# Altium PCB MAGI's7SegmentDisplay-Invert.PcbDoc
Units mil, origin at the board's own origin, x right, y up, seen from the top; angles counter-clockwise.
Board outline 6000 x 4000 mil, 2 copper layers (Top Layer, Bottom Layer); 16 components, 27 nets, 94 pads, 28 vias.
Unrouted connection lines stored in the file: 1.
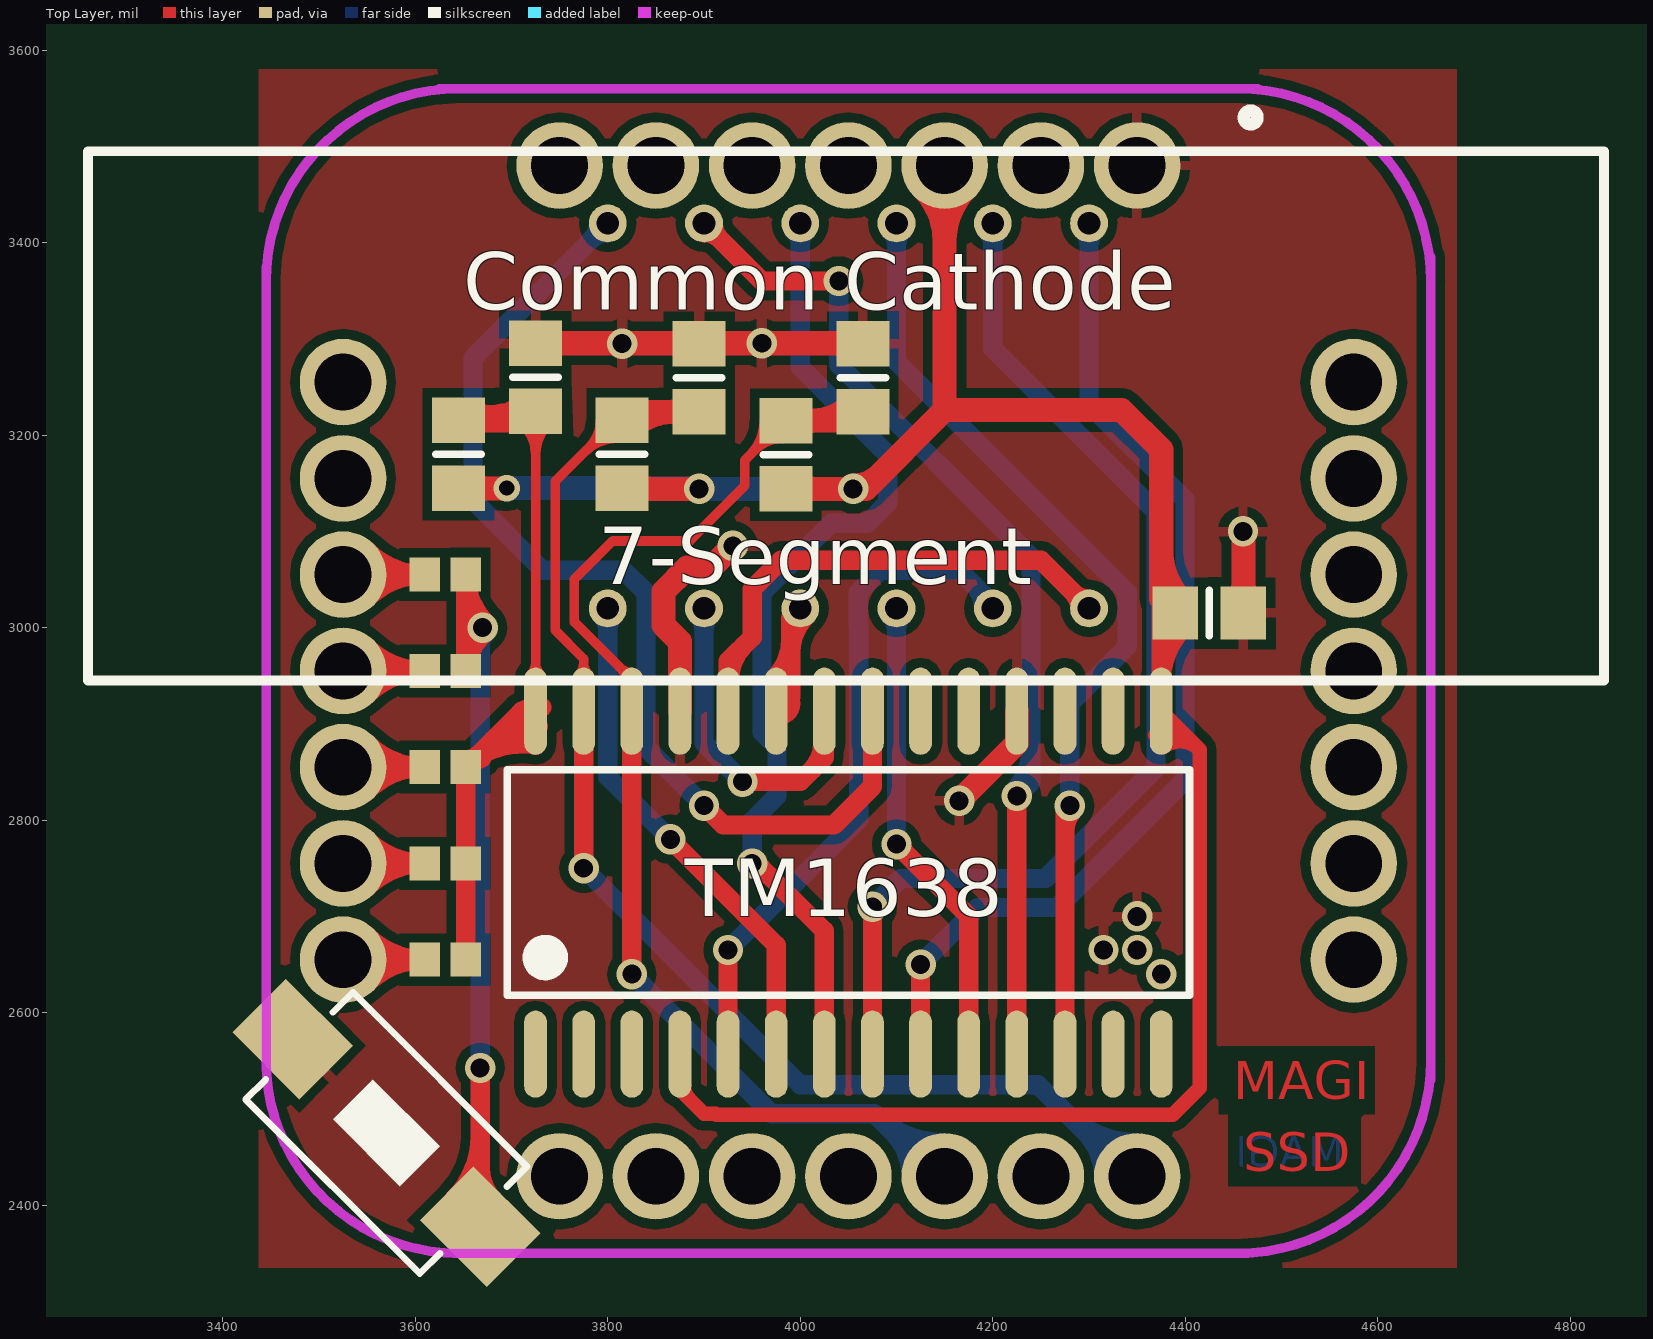
[diagram p0: Top Layer view]
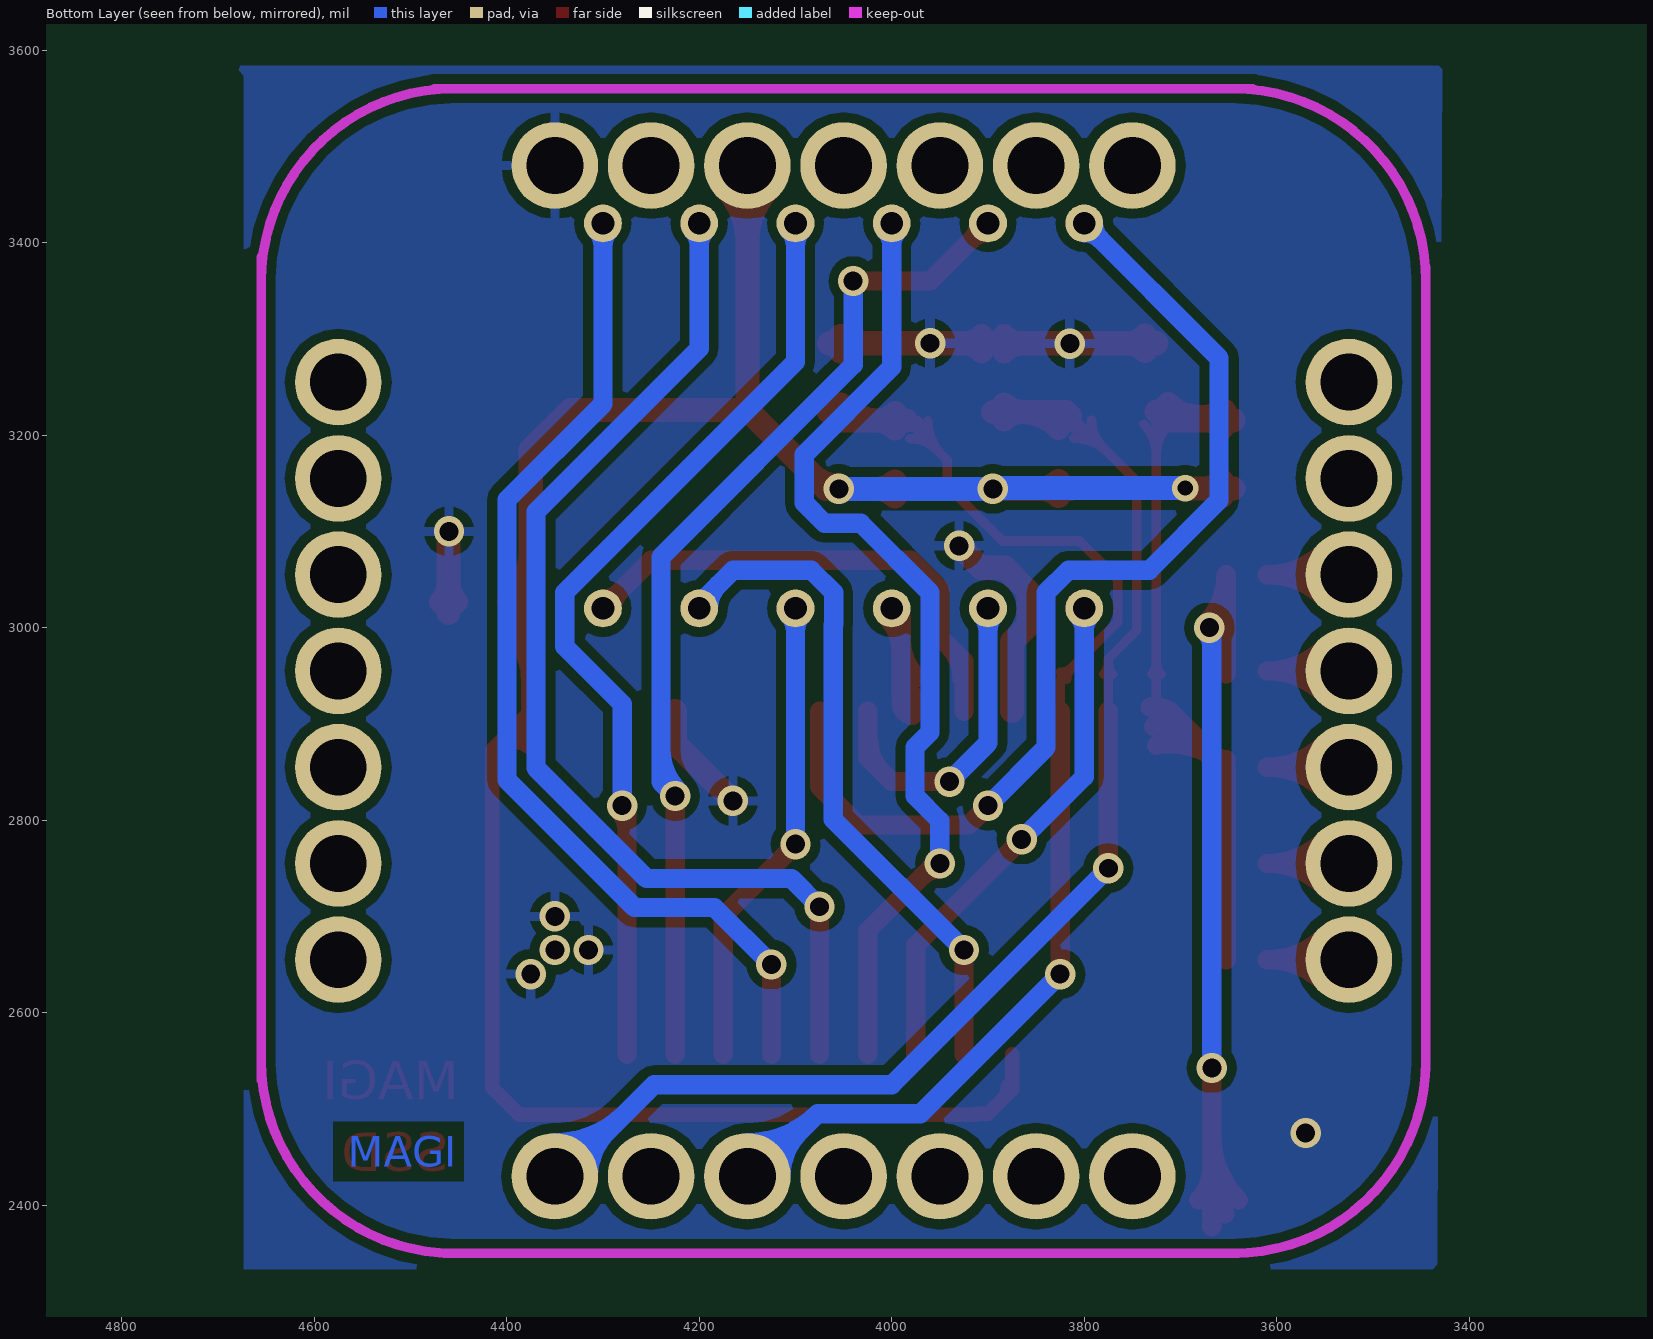
[diagram p1: Bottom Layer view, seen from below]

## Layer stack, top to bottom
Top Solder: solder mask 0.4, Solder Resist, Dk 3.5
Top Layer: signal copper 1.4
Dielectric1: dielectric 12.6, FR-4, Dk 4.8
Bottom Layer: signal copper 1.4
Bottom Solder: solder mask 0.4, Solder Resist, Dk 3.5

## Board outline
1000,1000 7000,1000 7000,5000 1000,5000

## Design rules (kind name [scope] priority, off if disabled: settings)
Clearance [All] p1: gap=10
PolygonConnect [All] p1: connectstyle=Relief reliefconductorwidth=10 reliefentries=4 polygonreliefangle="90 Angle" airgapwidth=10
RoutingVias [All] p1: holewidth=28 width=50 viastyle="Through Hole" minholewidth=28 minwidth=50 maxholewidth=28 maxwidth=50
SolderMaskExpansion [All] p1: expansion=4
Width [All] p1: maxlimit=100 minlimit=10 preferedwidth=30
29 further rules are at their usual default settings.

## Components (designator, comment, footprint, x,y, rotation, side; value= is the part's Value field where it differs from the comment)
C1 "CAP_1" 6-0805_N 3725,3260 r90 top
C2 "CAP_1" 6-0805_N 3895,3259.57 r270 top
C3 "CAP_1" 6-0805_N 4065,3259.57 r270 top
C4 "CAP_1" 6-0805_N 4425,3015 r0 top
J1 "MAGI-M8" MAGI-M8 4050,2955 r0 top
L1 "LED4" "0.36\"LED" 4050,3220 r180 top
R1 "RES1" 6-0805_N 3645,3180 r270 top
R2 "RES1" 6-0805_N 3815,3180 r270 top
R3 "RES1" 6-0805_N 3985,3179.57 r270 top
R4 "RES1" 1608[0603] 3625,2855 r180 top
R5 "RES1" 1608[0603] 3625,2755 r180 top
R6 "RES1" 1608[0603] 3625,2655 r180 top
R7 "RES1" 1608[0603] 3625,3055 r180 top
R8 "RES1" 1608[0603] 3625,2955 r180 top
S1 "SW-PB" SW-1-SMD 3570,2475 r45 top
U1 "TM1638" TM1638 4050,2735 r90 top

## Footprints (in the part's own frame and the unit in brackets; to place one, negate y for a bottom-side part, rotate by r counter-clockwise, add the part's x,y. Pads: shape width x height; smd on the part's side, far side on the other; paste and mask are expansions set on the pad)
"0.36\"LED" [mm]
  round 1 hole 0.6: 1(-6.35,-5.08) 2(-3.81,-5.08) 3(-1.27,-5.08) 4(1.27,-5.08) 5(3.81,-5.08) 6(6.35,-5.08) 7(6.35,5.08) 8(3.81,5.08) 9(1.27,5.08) 10(-1.27,5.08) 11(-3.81,5.08) 12(-6.35,5.08)
  silkscreen extent -19.94,-6.99 20.07,6.99
6-0805_N [mm] "Chip Resistor, Body 2.0x1.2mm, IPC Medium Density"
  rect 1.2x1.4 smd: 1(-0.9,0) 2(0.9,0)
  silkscreen extent 0,-0.6 0,0.6, body extent -1.07,-0.7 1.07,0.7, height 0.7
1608[0603] [mm] "Chip Capacitor, Body 1.6x0.8mm, IPC High Density"
  rect 0.8x0.9 smd: 1(-0.7,0) 2(0.381,0)
  body extent -0.87,-0.48 0.87,0.48, height 1.3
MAGI-M8 [mil]
  round 90 hole 59.06: 1(300,525) 2(200,525) 3(100,525) 4(0,525) 5(-100,525) 6(-200,525) 7(-300,525) 8(-525,300) 9(-525,200) 10(-525,100) 11(-525,0) 12(-525,-100) 13(-525,-200) 14(-525,-300) 15(-300,-525) 16(-200,-525) 17(-100,-525) 18(0,-525) 19(100,-525) 20(200,-525) 21(300,-525) 22(525,-300) 23(525,-200) 24(525,-100) 25(525,0) 26(525,100) 27(525,200) 28(525,300)
  Keep-Out Layer lines w10: -605,-415 -605,290 -605,420 ; -605,-405 ccw(c-405,-405) -405,-605 ; -605,405 cw(c-405,405) -405,605 ; -425,605 425,605 ; -410,-605 415,-605 ; 405,-605 ccw(c405,-405) 605,-405 ; 405,605 cw(c405,405) 605,405 ; 605,-425 605,430
SW-1-SMD [mm]
  rect 2x2.5 smd: 1(0,3.5) 2(0,-3.5)
  silkscreen extent -2,-3.25 2,3.25
TM1638 [mm] "SOIC, 28-Leads, Body 17.93x7.52mm, Pitch 1.27mm, IPC Medium Density"
  oval 2.3x0.6 smd: 1(-4.525,8.255) 2(-4.525,6.985) 3(-4.525,5.715) 4(-4.525,4.445) 5(-4.525,3.175) 6(-4.525,1.905) 7(-4.525,0.635) 8(-4.525,-0.635) 9(-4.525,-1.905) 10(-4.525,-3.175) 11(-4.525,-4.445) 12(-4.525,-5.715) 13(-4.525,-6.985) 14(-4.525,-8.255) 15(4.525,-8.255) 16(4.525,-6.985) 17(4.525,-5.715) 18(4.525,-4.445) 19(4.525,-3.175) 20(4.525,-1.905) 21(4.525,-0.635) 22(4.525,0.635) 23(4.525,1.905) 24(4.525,3.175) 25(4.525,4.445) 26(4.525,5.715) 27(4.525,6.985) 28(4.525,8.255)
  silkscreen extent -2.98,-9 2.98,9, body extent -3.8,-9 3.8,9, height 2.44

## Part data
C1 C2 C3 C4: "Capacitor"

## Via types
v1: diameter 31.5, hole 19.68, Top Layer to Bottom Layer, 27 vias
v2: diameter 27.56, hole 15.75, Top Layer to Bottom Layer, 1 vias

## Nets (pads, with @x,y where several pads share a name; then routed paths per layer and width w, separated by ;. In a path a pad name is that pad's centre, name@x,y a point inside that pad or via, vN(x,y) a via of type N, cw(c..) or ccw(c..) an arc to the next point about the centre after c; other vN are vias at no path point)
CLK: C2.2 J1.21 R2.1 U1.27 | length 1681.3
  Top Layer w10: U1.27@3770.18,2951.43 ccw(c3758.56,2963.06) 3775,2963.06 ccw(c3791.44,2963.06) U1.27@3779.82,2951.43 ; U1.27 3775,2967.66 3745.31,2997.35 3745.31,3151.84 3813.47,3220 R2.1@3815,3220 ; 3775.59,3182.12 cw(c3811.06,3146.65) R2.1@3811.06,3196.81 ; 3780.8,3187.32 ccw(c3752.69,3215.43) R2.1@3792.44,3215.43 ; R2.1@3792.66,3199.19 cw(c3811.06,3180.79) R2.1@3811.06,3206.81
  Top Layer w20: v1(3775,2750) U1.27
  Top Layer w25: R2.1@3815,3220 3819.13,3224.13 C2.2 ; R2.1@3826.8,3207.57 cw(c3866.79,3167.58) 3866.79,3224.13 ; C2.2@3883.2,3216.27 ccw(c3864.21,3197.28) 3864.21,3224.13 ccw(c3864.21,3250.98) C2.2@3883.2,3232
  Bottom Layer w20: v1(3775,2750) 4000,2525 4246.92,2525 4341.92,2430 J1.21 ; 4276.46,2495.46 ccw(c4350,2569) J1.21@4350,2465 ; 4295.96,2475.96 cw(c4250,2430) J1.21@4315,2430 ; 4310.61,2461.32 ccw(c4350,2500.71) J1.21@4350,2445
DIO: C3.2 J1.19 R3.1 U1.26 | length 1614.7
  Top Layer w10: 3812.23,2958.71 ccw(c3825,2971.48) U1.26@3825,2953.43 ; 3813.84,2957.1 cw(c3803.36,2946.61) U1.26@3818.19,2946.61 ; U1.26 3825,2945.95 3765.31,3005.63 3765.31,3050.31 3805,3090 3885,3090 3942.44,3147.44 3942.44,3173.97 3983.47,3215 R3.1 ; 3947.57,3179.1 ccw(c3911.66,3215) R3.1@3962.44,3215 ; 3953.39,3184.91 cw(c3981.06,3157.24) R3.1@3981.06,3196.38 ; R3.1@3964.64,3196.17 ccw(c3945.81,3215) R3.1@3972.44,3215
  Top Layer w20: v1(3825,2640) U1.26
  Top Layer w25: R3.1 4055.87,3215 C3.2 ; R3.1@3996.8,3207.14 cw(c4015.79,3188.15) 4015.79,3215 cw(c4015.79,3241.85) R3.1@3996.8,3222.86 ; R3.1@4012.17,3215 ccw(c4012.17,3273.03) C3.2@4053.2,3232
  Bottom Layer w20: v1(3825,2640) 3970,2495 4076.92,2495 4141.92,2430 J1.19 ; 4076.93,2495 ccw(c4149.35,2567.41) J1.19@4149.83,2465 ; 4095.96,2475.96 cw(c4050,2430) J1.19@4115,2430 ; 4110.84,2461.08 ccw(c4149.67,2499.91) J1.19@4149.93,2445
GND: C1.2 C2.1 C3.1 C4.2 J1.1 S1.1 U1.18 U1.25 | length 977.6
  Top Layer w25: C1.2 4064.57,3295.43 C3.1 ; C1.2@3736.8,3287.57 cw(c3755.79,3268.58) 3755.79,3295.43 cw(c3755.79,3322.28) C1.2@3736.8,3303.3 ; 3863.16,3295.43 cw(c3863.16,3267.1) C2.1@3883.2,3287.14 ; 3865.26,3295.43 ccw(c3865.26,3320.8) C2.1@3883.2,3302.86 ; U1.25 3875,2985.34 3857.81,3002.53 3857.81,3037.47 3882.53,3062.19 3907.19,3062.19 v1(3930,3085) ; C2.1@3906.8,3287.14 cw(c3926.84,3267.1) 3926.84,3295.43 ; C2.1@3906.8,3302.86 ccw(c3924.74,3320.8) 3924.74,3295.43 ; 4033.16,3295.43 cw(c4033.16,3267.1) C3.1@4053.2,3287.14 ; 4035.26,3295.43 ccw(c4035.26,3320.8) C3.1@4053.2,3302.86 ; v1(4165,2820) 4225,2880 U1.18 ; C4.2@4452.57,3026.8 ccw(c4433.58,3045.79) 4460.43,3045.79 ccw(c4487.28,3045.79) C4.2@4468.3,3026.8 ; v1(4460,3100) 4460.43,3099.57 C4.2
  other v1: 3570,2475 4375,2640 4315,2665 4350,2665 4350,2700 3815,3295 3960,3295.43
GRID1: L1.12 U1.24 | length 595.4
  Top Layer w20: U1.24 3925,2965 3950,2990 3950,3040 3980,3070 4250,3070 L1.12 ; U1.24@3926.81,2946.61 cw(c3975.57,2946.61) 3941.09,2981.09 ; L1.12@4290.31,3020 ccw(c4266.93,3020) 4283.47,3036.53 ccw(c4300,3053.07) L1.12@4300,3029.68
GRID2: L1.9 U1.23 | length 271.1
  Top Layer w20: U1.23@3973.72,2947.9 ccw(c3934.41,2987.2) 3990,2987.2 ; U1.23@3974.83,2948.42 ccw(c3973.27,2965.08) 3990,2965.08 ; U1.23 3990,2928.15 3990,3010 L1.9 ; U1.23@3976.7,2928.51 ccw(c3975.33,2943.11) 3990,2943.11 ; U1.23@3978.57,2908.59 ccw(c3977.39,2921.15) 3990,2921.15 ; 3990,2972.48 cw(c4047.52,2972.48) L1.9@4006.85,3013.15
GRID3: L1.8 U1.22 | length 408.1
  Top Layer w20: v1(3940,2840) 4000,2840 4025,2865 U1.22 ; 4011.52,2851.52 ccw(c3983.36,2879.69) U1.22@4023.19,2879.69
  Bottom Layer w20: L1.8@3893.15,3013.15 cw(c3876.62,2996.62) 3900,2996.62 cw(c3923.38,2996.62) L1.8@3906.85,3013.15 ; L1.8 3900,2880 v1(3940,2840)
GRID4: L1.6 U1.21 | length 1126.3
  Top Layer w20: v1(3900,2815) 3920,2795 4035,2795 4075,2835 U1.21
  Bottom Layer w20: L1.6@3790.32,3420 cw(c3766.93,3420) 3783.47,3403.47 cw(c3800,3386.93) L1.6@3800,3410.32 ; L1.6 3660,3280 3660,3132.23 3732.54,3059.69 3816.44,3059.69 3839.69,3036.44 3839.69,2875.31 v1(3900,2815)
GRID5: U1.20
GRID6: U1.19
GRID7: U1.17
GRID8: U1.16
NetJ1_10: J1.10 R7.2 | length 217.7
  Top Layer w20: J1.10 R7.2 ; J1.10@3549.75,3030.25 cw(c3609.5,2970.5) 3609.5,3055 cw(c3609.5,3139.5) J1.10@3549.75,3079.75
NetJ1_11: J1.11 R8.2 | length 217.7
  Top Layer w20: J1.11 R8.2 ; J1.11@3549.75,2930.25 cw(c3609.5,2870.5) 3609.5,2955 cw(c3609.5,3039.5) J1.11@3549.75,2979.75
NetJ1_12: J1.12 R4.2 | length 217.7
  Top Layer w20: J1.12 R4.2 ; J1.12@3549.75,2830.25 cw(c3609.5,2770.5) 3609.5,2855 cw(c3609.5,2939.5) J1.12@3549.75,2879.75
NetJ1_13: J1.13 R5.2 | length 217.7
  Top Layer w20: J1.13 R5.2 ; J1.13@3549.75,2730.25 cw(c3609.5,2670.5) 3609.5,2755 cw(c3609.5,2839.5) J1.13@3549.75,2779.75
NetJ1_14: J1.14 R6.2 | length 217.7
  Top Layer w20: J1.14 R6.2 ; J1.14@3549.75,2630.25 cw(c3609.5,2570.5) 3609.5,2655 cw(c3609.5,2739.5) J1.14@3549.75,2679.75
NetR7_1: R7.1 R8.1 S1.2 | length 1025.3
  Top Layer w20: S1.2@3639.71,2405.29 ccw(c3572.77,2472.23) 3667.44,2472.23 ; R8.1@3652.56,2951.74 cw(c3708.62,2951.74) v1@3673.59,2995.51 ; R8.1 R7.1 ccw(c3723.62,3055) v1@3674.01,3004.12 ; 3652.56,2993.36 cw(c3675.31,2993.36) v1@3661.09,3011.13 ; 3652.56,3007.56 ccw(c3677.37,3007.56) v1@3660.05,2989.8 ; S1.2@3653.85,2391.15 ccw(c3621.05,2423.95) S1.2@3667.44,2423.95 ; S1.2 v1(3667.44,2542.56) ; 3667.44,2438.63 ccw(c3714.58,2438.63) S1.2@3681.24,2405.29
  Bottom Layer w20: v1(3667.44,2542.56) v1@3667.44,2990.12 ; 3667.44,2979.93 cw(c3690.07,2979.93) v1@3674.06,2995.94
  other v1: 3670,3000
SEG1: L1.11 U1.5 | length 731.7
  Top Layer w20: U1.5 v1(3925,2665)
  Bottom Layer w20: v1(3925,2665) 4060.75,2800.75 4060.75,3003.13 4060.31,3003.56 4060.31,3036.44 4083.56,3059.69 4165,3059.69 4200,3024.69 L1.11 ; 4180.15,3044.53 cw(c4155.62,3020) L1.11@4190.32,3020
SEG2: L1.7 U1.6 | length 572.4
  Top Layer w20: v1(3865,2780) 3975,2670 U1.6
  Bottom Layer w20: L1.7@3793.15,3013.15 cw(c3776.62,2996.62) 3800,2996.62 cw(c3823.38,2996.62) L1.7@3806.85,3013.15 ; L1.7 3800,2845 v1(3865,2780)
SEG3: L1.4 U1.7 | length 1072.8
  Top Layer w20: v1@3950,2749.25 cw(c3950,2723.3) 3968.35,2741.65 ; v1@3960,2750 4025,2685 U1.7
  Bottom Layer w20: v1(3950,2755) 3950,2799.44 3975.75,2825.19 3975.75,2875.75 3960.31,2891.18 3960.31,3036.44 4032.26,3108.38 4069.81,3108.38 4090.75,3129.32 4090.75,3179.88 4000,3270.63 L1.4 ; L1.4@3993.15,3413.15 cw(c3976.62,3396.62) 4000,3396.62 cw(c4023.38,3396.62) L1.4@4006.85,3413.15
SEG4: L1.2 U1.8 | length 1180.4
  Top Layer w20: U1.8 v1(4075,2710)
  Bottom Layer w20: v1(4075,2710) 4104.25,2739.25 4254.81,2739.25 4369.69,2854.13 4369.69,3120.31 4200,3290 L1.2 ; L1.2@4193.15,3413.15 cw(c4176.62,3396.62) 4200,3396.62 cw(c4223.38,3396.62) L1.2@4206.85,3413.15
SEG5: L1.1 U1.9 | length 1103.6
  Top Layer w20: U1.9 v1(4125,2650)
  Bottom Layer w20: v1(4125,2650) 4184.25,2709.25 4267.23,2709.25 4399.69,2841.7 4399.69,3132.74 4300,3232.43 L1.1 ; L1.1@4293.15,3413.15 cw(c4276.62,3396.62) 4300,3396.62 cw(c4323.38,3396.62) L1.1@4306.85,3413.15
SEG6: L1.10 U1.10 | length 530.9
  Top Layer w20: v1(4100,2775) 4175,2700 U1.10
  Bottom Layer w20: L1.10@4093.15,3013.15 cw(c4076.62,2996.62) 4100,2996.62 cw(c4123.38,2996.62) L1.10@4106.85,3013.15 ; v1(4100,2775) L1.10
SEG7: L1.5 U1.11 | length 1143.8
  Top Layer w20: L1.5@3900,3410.32 cw(c3900,3386.93) 3916.53,3403.47 cw(c3933.07,3420) L1.5@3909.68,3420 ; L1.5 3960,3360 v1(4040,3360) ; U1.11 v1(4225,2825)
  Bottom Layer w20: v1(4040,3360) 4040,3273.05 4239.69,3073.37 4239.69,2839.69 v1(4225,2825) ; v1@4220.94,2829.06 ccw(c4175.67,2874.33) 4239.69,2874.33
SEG8: L1.3 U1.12 | length 1050.3
  Top Layer w20: U1.12 4275,2810 v1(4280,2815) ; 4275,2789.05 cw(c4305.95,2789.05) v1@4284.06,2810.94
  Bottom Layer w20: L1.3@4093.15,3413.15 cw(c4076.62,3396.62) 4100,3396.62 cw(c4123.38,3396.62) L1.3@4106.85,3413.15 ; L1.3 4100,3276.12 4339.69,3036.44 4339.69,2980.31 4280,2920.63 v1(4280,2815)
STB: C1.1 R1.1 R4.1 R5.1 R6.1 U1.28 | length 1101
  Top Layer w10: C1.1@3711.83,3211.4 cw(c3680.04,3179.61) 3725,3179.61 cw(c3769.96,3179.61) C1.1@3738.17,3211.4 ; U1.28@3720.18,2951.43 ccw(c3708.56,2963.06) 3725,2963.06 ccw(c3741.44,2963.06) U1.28@3729.82,2951.43 ; U1.28 C1.1
  Top Layer w20: R6.1 R5.1 R4.1 ; R4.1@3652.56,2862.72 ccw(c3652.56,2881.35) R4.1@3665.73,2868.17 ; R4.1@3654.05,2862.52 ccw(c3659.14,2881.54) 3668.99,2864.49 ; 3679.86,2882.3 cw(c3718.75,2843.41) U1.28@3728.09,2897.61 ; 3707.16,2909.6 cw(c3726.77,2889.98) U1.28@3731.48,2917.32 ; U1.28@3724.69,2877.9 ccw(c3710.73,2796.84) R4.1 ; U1.28 3710.71,2913.15 R4.1
  Top Layer w25: R1.1 3715.87,3215.43 C1.1 ; R1.1@3654.5,3225.07 ccw(c3678.18,3266.09) 3690.45,3220.33 ; R1.1@3656.8,3207.57 cw(c3675.79,3188.58) 3675.79,3215.43 cw(c3675.79,3242.28) R1.1@3656.8,3223.3 ; R1.1@3672.16,3215.43 ccw(c3672.16,3273.47) C1.1@3713.2,3232.43
VCC: C4.1 J1.3 R1.2 R2.2 R3.2 U1.4 U1.15 | length 2989.6
  Top Layer w15: U1.4 3875,2520 3900,2495 3911.93,2495 3912.86,2494.07 4387.14,2494.07 4415,2521.93 4415,2873.15 ; U1.4@3879.31,2523.39 ccw(c3897.89,2523.39) 3884.75,2510.25 ; U1.15@4368.76,2888.36 cw(c4384.03,2867.14) 4402.52,2885.63 ; U1.15 4415,2873.15 ; U1.15@4377.52,2876.19 cw(c4394.47,2852.63) 4415,2873.15
  Top Layer w20: U1.15 C4.1@4375,3030 ; U1.15@4375,2943.01 cw(c4457.63,2943.01) C4.1@4399.2,3001.43 ; C4.1@4375,2991.29 cw(c4409.34,2991.29) C4.1@4385.06,3015.57
  Top Layer w25: R1.2 3694.57,3144.57 v2(3695,3145) ; R1.2@3656.8,3136.7 cw(c3675.79,3117.72) 3675.79,3144.57 cw(c3675.79,3171.42) R1.2@3656.8,3152.43 ; R2.2@3815,3144.13 v1(3895,3144.13) ; R2.2@3826.8,3136.7 cw(c3844.74,3118.76) 3844.74,3144.13 ; R2.2@3826.8,3152.43 ccw(c3846.84,3172.46) 3846.84,3144.13 ; R3.2 v1(4055,3144.13) 4068,3144.13 4150,3226.13 ; R3.2@3996.8,3136.27 cw(c4015.79,3117.28) 4015.79,3144.13 cw(c4015.79,3170.98) R3.2@3996.8,3152 ; v1@4055,3147.38 ccw(c4055,3186.61) 4082.74,3158.87 ; J1.3@4127.02,3457.02 cw(c4071.54,3401.54) 4150,3401.54 cw(c4228.46,3401.54) J1.3@4172.98,3457.02 ; J1.3 4150,3226.13 ; C4.1@4375,3030 4375,3185 4333.87,3226.13 4150,3226.13 ; 4375,3080.96 ccw(c4451.59,3080.96) C4.1@4397.43,3026.8
  Bottom Layer w25: v2(3695,3145) v1@3890,3145 ; v1@3889.13,3144.13 v1(4055,3144.13)
pads on no net: J1.2 J1.4 J1.5 J1.6 J1.7 J1.8 J1.9 J1.15 J1.16 J1.17 J1.18 J1.20 J1.22 J1.23 J1.24 J1.25 J1.26 J1.27 J1.28 U1.1 U1.2 U1.3 U1.13 U1.14

## Polygon pours and split planes (outlines as drawn)
GND on Top Layer "Top Layer-No Net" (solid, pour order 2): 3437.17,3579.91 4682.17,3579.91 4682.17,2334.91 3437.17,2334.91
GND on Bottom Layer "Top Layer-No Net" (solid, pour order 4): 3428.15,3583.46 4683.15,3583.46 4673.15,3573.46 4673.15,2333.46 3438.15,2333.46 3433.15,2338.46

## Other copper
Top Layer:
  text "MAGI" at 4450,2510 h39.37
  text "SSD" at 4460,2435 h40
Bottom Layer:
  text "MAGI" at 4565,2440 h31.5

## Silkscreen, mask and mechanical layers (free items; w line width, h text height)
Top Overlay:
  circle w13: c4467.93,3530 r7.07
  text "Common Cathode" at 3650,3330 h60
  text "7-Segment" at 3790,3045 h60
  text "TM1638" at 3880,2700 h60